# Altium PCB Schema.PcbDoc
Units mm, origin at the board's own origin, x right, y up, seen from the top; angles counter-clockwise.
Board outline 51.01 x 51.01 mm, 2 copper layers (Top Layer, Bottom Layer); 14 components, 9 nets, 44 pads, 15 vias.
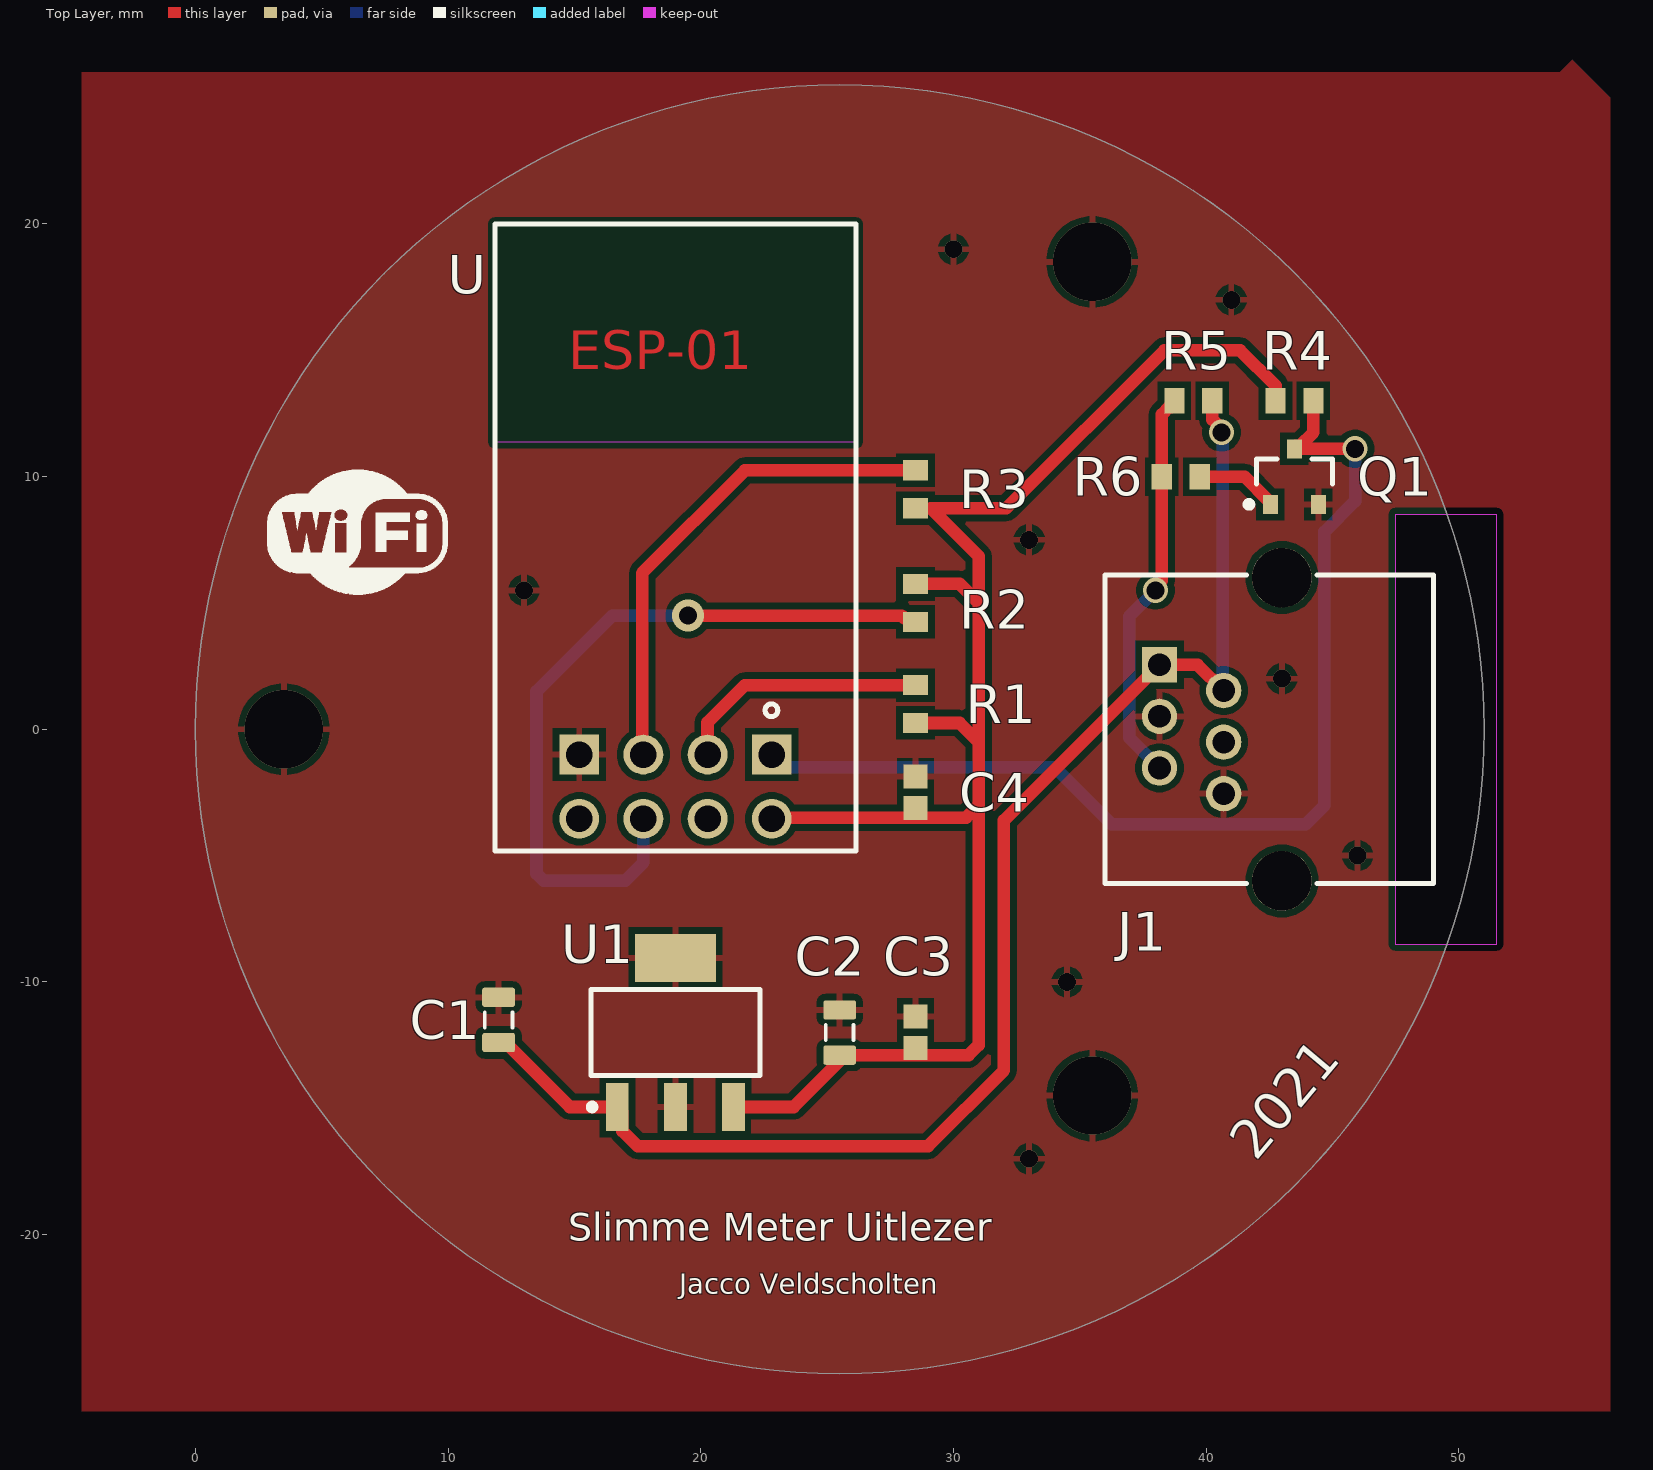
[diagram p0: Top Layer view]
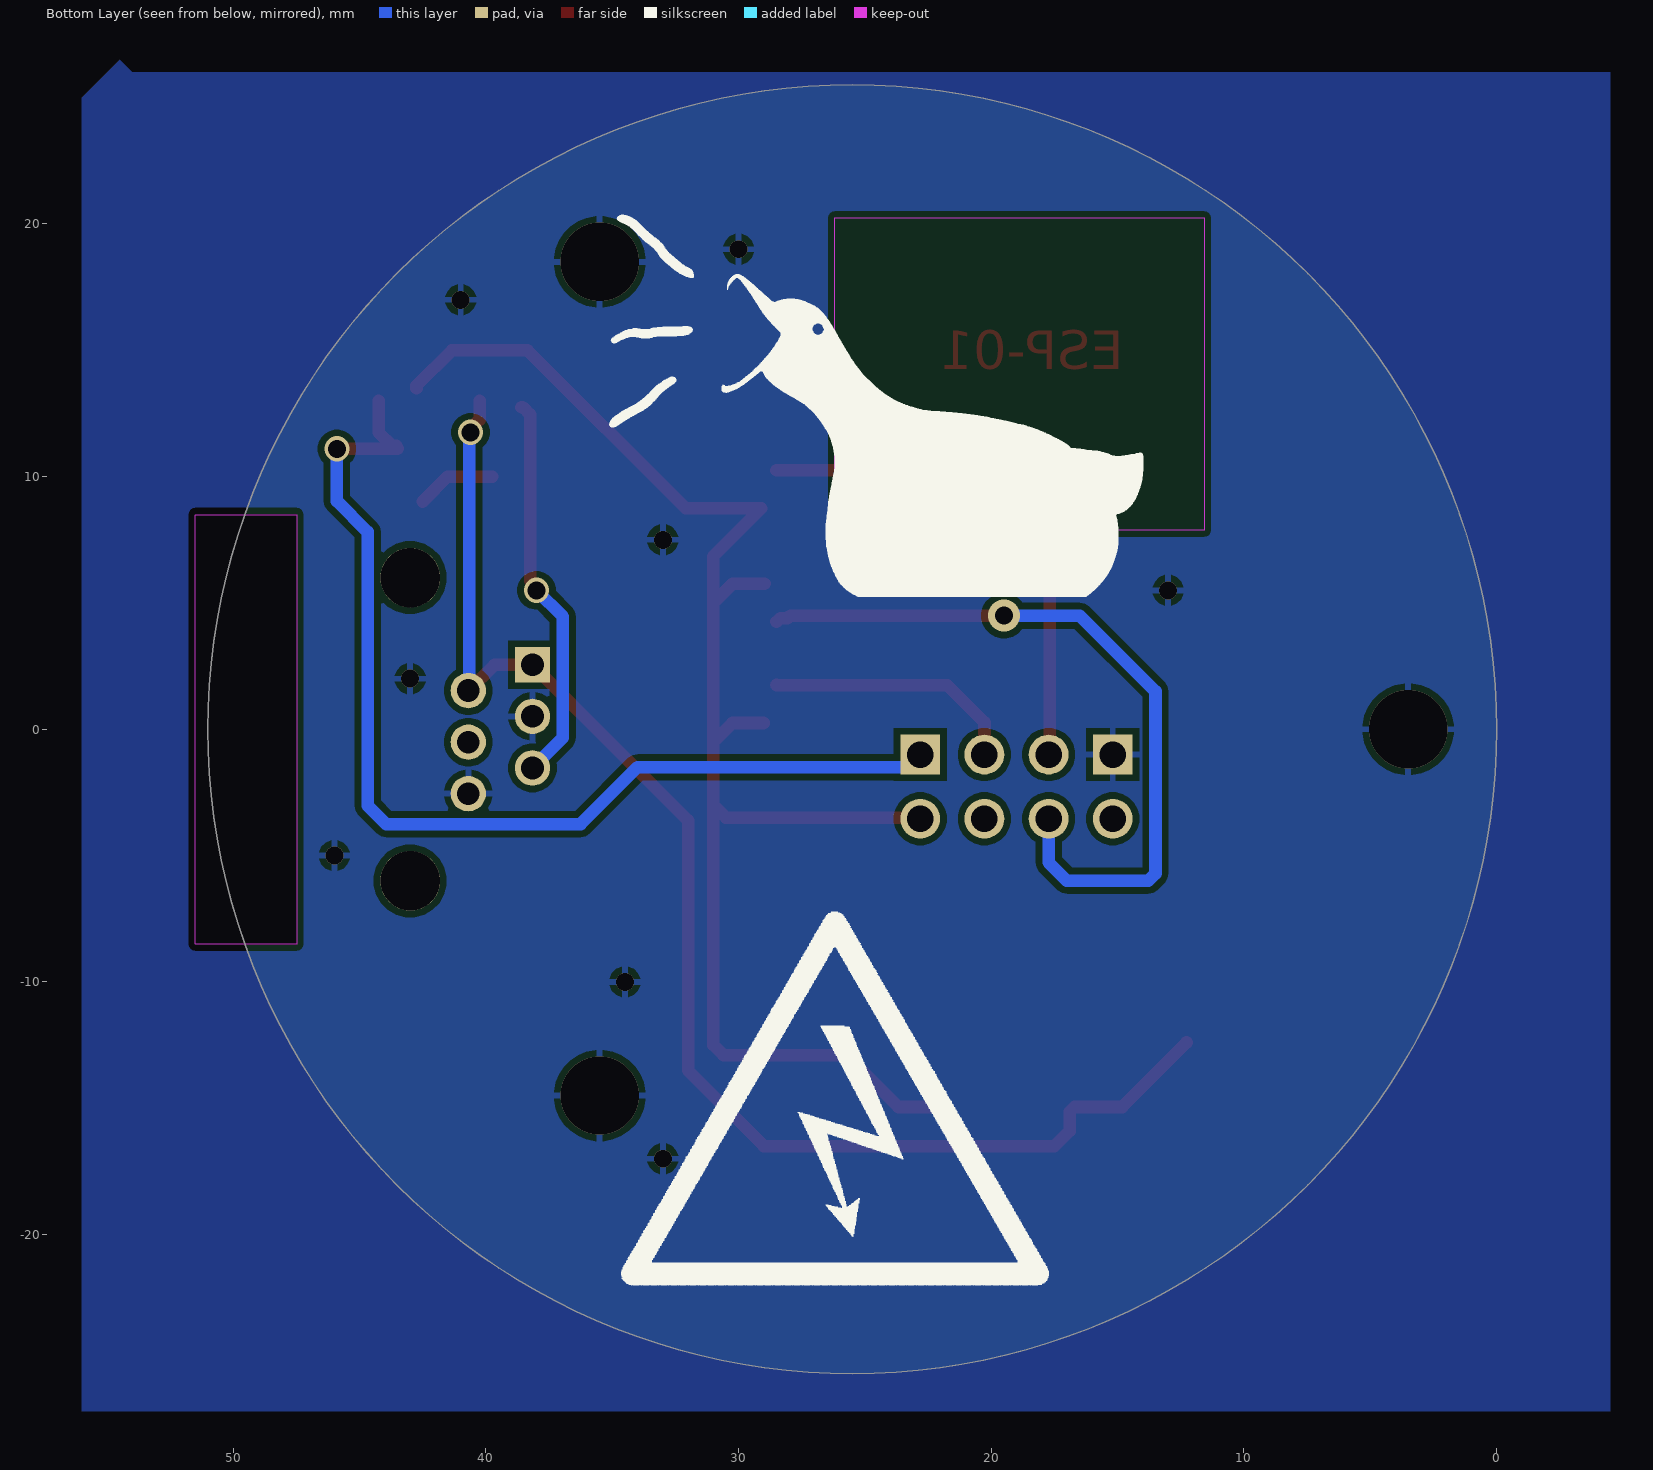
[diagram p1: Bottom Layer view, seen from below]
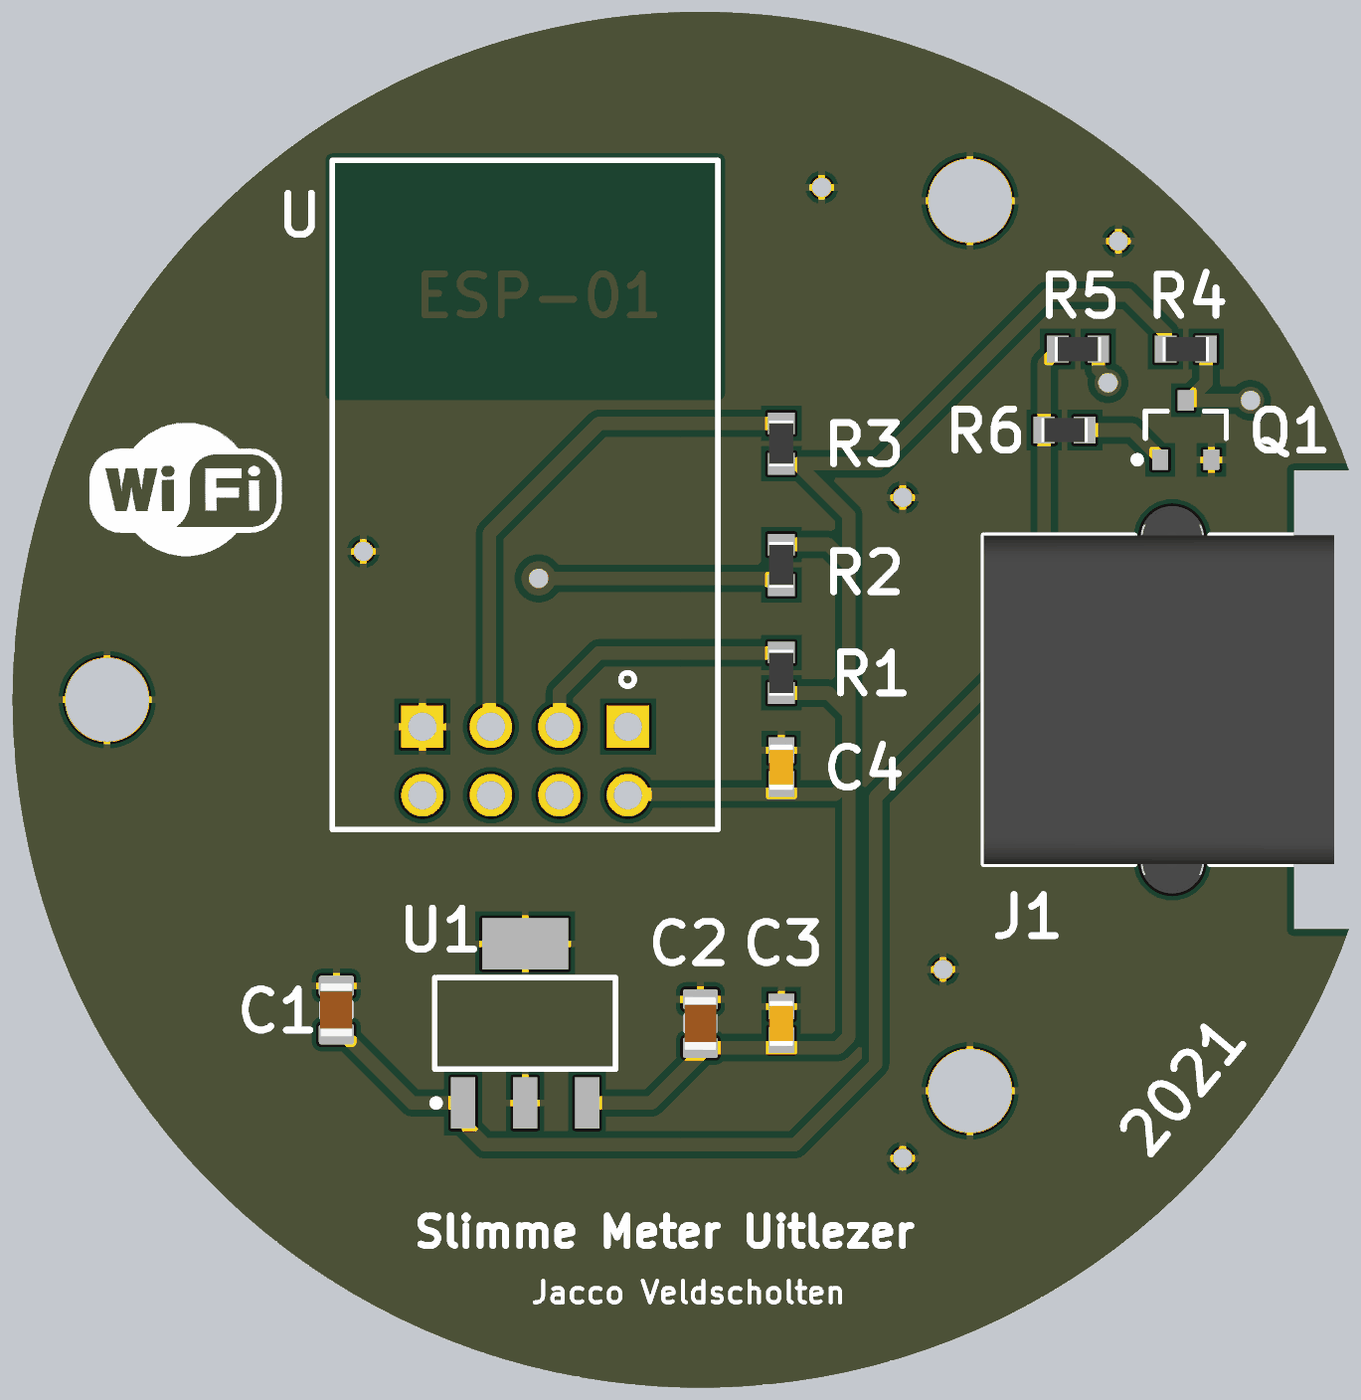
[diagram p2: 3D render of the assembled board from above, using the file's embedded part models]

## Layer stack, top to bottom
Top Solder: solder mask 0.0102, Solder Resist, Dk 3.5
Top Layer: signal copper 0.0356
Dielectric 1: dielectric 0.32, FR-4, Dk 4.8
Bottom Layer: signal copper 0.0356
Bottom Solder: solder mask 0.0102, Solder Resist, Dk 3.5

## Board outline
-0.005,0 ccw(c25.5,0) 25.5,-25.505 ccw(c25.5,0) 51.005,0 ccw(c25.5,0) 25.5,25.505 ccw(c25.5,0)
cut-out: 47.5,8.5 47.5,-8.5 51.5,-8.5 51.5,8.5

## Design rules (kind name [scope] priority, off if disabled: settings)
Clearance [All] p1: gap=0.254 ignorepadtopadclearanceinfootprint=FALSE except(0: Arc-Hole Track-Hole SMDPad-Hole THPad-Hole Via-Hole Fill-Hole Poly-Hole Region-Hole Text-Hole)
PolygonConnect [All] p1: connectstyle=Relief reliefconductorwidth=0.254 reliefentries=4 polygonreliefangle="90 Angle" airgapwidth=0.254
RoutingVias [All] p1: holewidth=0.711 width=1.27 viastyle="Through Hole" minholewidth=0.711 minwidth=1.27 maxholewidth=0.711 maxwidth=1.27
SolderMaskExpansion [All] p1: expansion=0.102 istentingtop=FALSE
Width [All] p1: maxlimit=0.5 minlimit=0.5 preferedwidth=0.5 minimp=50.000000 maximp=50.000000 favimp=50.000000
30 further rules are at their usual default settings.

## Components (designator, comment, footprint, x,y, rotation, side; value= is the part's Value field where it differs from the comment)
C1 "Capacitor 10µF +/-20% 25V 0805" CAPC0805(2012)145_L 12,-11.5 r90 top value=10µF
C2 "Capacitor 10µF +/-20% 25V 0805" CAPC0805(2012)145_L 25.5,-12 r90 top value=10µF
C3 "Capacitor 100 nF +/-10% 50 V 0603" CAPC1608X90X40NL10T20 28.5,-12 r90 top value=100nF
C4 "Capacitor 100 nF +/-10% 50 V 0603" CAPC1608X90X40NL10T20 28.5,-2.5 r90 top value=100nF
J1 "615006138421" 615006138421 42.5,0 r90 top
Q1 "BCW66KH" INF-SOT23_L 43.5,10 r90 top
R1 "Resistor 100k +/-1% 0603 100 mW" RESC1608X55X25ML10T15 28.5,1 r90 top value=10K
R2 "Resistor 100k +/-1% 0603 100 mW" RESC1608X55X25ML10T15 28.5,5 r90 top value=10K
R3 "Resistor 100k +/-1% 0603 100 mW" RESC1608X55X25ML10T15 28.5,9.5 r90 top value=10K
R4 "Resistor 100k +/-1% 0603 100 mW" RESC1608X55X25ML10T15 43.5,13 r180 top value=2.2K
R5 "Resistor 100k +/-1% 0603 100 mW" RESC1608X55X25ML10T15 39.5,13 r0 top value=2.2K
R6 "Resistor 100k +/-1% 0603 100 mW" RESC1608X55X25ML10T15 39,10 r0 top value=1k
U "ESP8266-01/ESP-01" XCVR_ESP8266-01/ESP-01 19,-1 r90 top
U1 "TC1262-3.3VDB" SOT-223-DB3_L 19,-12 r90 top

## Footprints (in the part's own frame and the unit in brackets; to place one, negate y for a bottom-side part, rotate by r counter-clockwise, add the part's x,y. Pads: shape width x height; smd on the part's side, far side on the other; paste and mask are expansions set on the pad)
615006138421 [mm] "Modular Jack Horizontal Plastic 6P6C Tab Up"
  rect 1.4x1.4 hole 0.9: 1(2.55,4.34)
  round 1.4 hole 0.9: 2(1.53,1.8) 3(0.51,4.34) 4(-0.51,1.8) 4(-0.51,1.8) 5(-1.53,4.34) 6(-2.55,1.8)
  round 2.36 hole 2.36 unplated: MH1(-6,-0.5) MH2(6,-0.5)
  silkscreen extent -6.1,-6.5 6.1,6.5, body extent -7.2,-6.5 7.2,6.5, height 14.55
CAPC0805(2012)145_L [mm] "Chip Capacitor, Body 2.0x1.2mm, Height 1.45mm, IPC High Density"
  rrect25% 0.76x1.3 smd: 1(-0.9,0) 2(0.89,0)
  silkscreen extent -0.3,-0.55 0.3,0.55, body extent -1,-0.6 1,0.6, height 1.45
CAPC1608X90X40NL10T20 [mm] "Chip Capacitor, 2-Leads, Body 1.70x0.90mm, IPC Medium Density"
  rect 0.95x0.95 smd: 1(-0.625,0) 2(0.625,0)
  body extent -0.85,-0.45 0.85,0.45, height 0.9
INF-SOT23_L [mm] "SOT23, 3-Leads, Body 2.9x1.3 mm, Pitch 0.95 mm, IPC High Density"
  rect 0.75x0.6 smd: 1(-1.1,0.95) 2(-1.1,-0.95) 3(1.1,0)
  silkscreen extent -1.22,-1.5 0.7,1.92, body extent -0.7,-1.5 0.7,1.5, height 1.1
RESC1608X55X25ML10T15 [mm] "Chip Resistor, 2-Leads, Body 1.70x0.90mm, IPC Low Density"
  rect 0.8x1 smd: 1(-0.75,0) 2(0.75,0)
  body extent -0.85,-0.45 0.85,0.45, height 0.55
SOT-223-DB3_L [mm] "SOT223, 4-Leads, Body 6.5x3.5mm, Pitch 2.3mm, Lead Span 7mm, IPC High Density"
  rect 1.9x0.9 smd: 1(-2.95,2.3) 2(-2.95,0) 3(-2.95,-2.3)
  rect 1.9x3.2 smd: 4(2.95,0)
  silkscreen extent -3.07,-3.35 1.7,3.42, body extent -1.85,-3.35 1.85,3.35, height 1.8
XCVR_ESP8266-01/ESP-01 [mm]
  rect 1.575x1.575 hole 1.05: 1(0,-3.81) 4(0,3.81)
  round 1.575 hole 1.05: 2(0,-1.27) 3(0,1.27) 5(-2.54,3.81) 6(-2.54,1.27) 7(-2.54,-1.27) 8(-2.54,-3.81)
  silkscreen extent -3.81,-7.15 21,7.15

## Part data
C1 C2: library part CMP-001-00079-3, "Chip Capacitor, 10µF +/-20%, 25V, 0805, Thickness 1.45 mm", Case/Package=0805, Max Operating Temperature=85°C, Min Operating Temperature=-55°C, Tolerance=10%, Voltage Rating=25V, Mounting Technology=SMT, Pins=2
C3 C4: library part CMP-001-00017-5, "Chip Capacitor, 100 nF, +/- 10%, 50 V, 0603 (1608 Metric)", Capacitor Type=Ceramic, Case/Package=0603, Max Operating Temperature=125°C, Min Operating Temperature=-55°C, Tolerance=10%, Voltage Rating=50V, Mounting Technology=SM, Pins=2, RoHS Compliant=True
J1: library part CMP-1502-01673-1, "Modular Jack WR-MJ, Tab Up, Plastic, Horizontal Entry, THT, 6P6C", Contact Resistance=20mOhm, Manufacturer="Wurth Elektronik", Operating Temperature=-40to85degC, Rated Current=1.5A, Withstanding Voltage=1000VAC, Working Voltage=120VAC, Compliance=Leadfree/RoHS, Datasheet URL=https://katalog.we-online.com/em/datasheet/615006138421.pdf, Entrance=Horizontal, Manufacturer URL=http://www.we-online.de, Mounting Technology=THT, Package Reference=615006138421, Packaging=Tray, Part Number=615006138421, Pin Number=6P6C, Port=1x1, Publisher=WurthElektronik
Q1: library part CMP-1177-00067-1, "NPN Silicon AF Transistor, 45 V VCEO, 800 mA IC, SOT23, Reel, Green", Manufacturer=Infineon, ComponentLink1Description="Manufacturer URL", ComponentLink1URL=http://www.infineon.com/, ComponentLink2Description=Datasheet, ComponentLink2URL=http://www.infineon.com/dgdl/bcw66k.pdf?folderId=db3a304314dca389011545f4eb561884&fileId=db3a304314dca389011547504ebe1a07, ComponentLink3Description="Package Specification", ComponentLink3URL=http://www.infineon.com/dgdl/SOT23-Package_Overview.pdf?folderId=db3a30431936bc4b0119532290053c66&fileId=db3a30431936bc4b0119533468123c85, fT (typ)="170Â MHz", Green=TRUE, IBM (max)="200Â mA", IC="100Â mA", IC (max)="800Â mA", ICBO (max)="20Â nA", ICM (max)="1,000Â mA", Mounting Technology="Surface Mount", PackageDescription="3-Pin Small Outline Transistor Package, 1.3 x 2.9 mm Body, 0.95 mm Pitch", PackageReference=SOT23, PackageVersion=Apr-08, Packing=Reel, PartNumber=BCW66KH, Polarity=NPN, Ptot (max)="500 mW", VCBO (max)="75Â V", VCE="1 V", VCEO (max)="45 V", VEBO (max)="5Â V"
R1 R2 R3 R4 R5 R6: library part CMP-009-00023-4, "Chip Resistor, 100 KOhm, +/- 1%, 0.1 W, -55 to 155 degC, 0603 (1608 Metric)", Case/Package=0603, Max Operating Temperature=155°C, Min Operating Temperature=-55°C, Power=100mW, Tolerance=1%, Voltage Rating=50V, Mounting Technology=SM, Pins=2, RoHS Compliant=True
U: "ESP-01 wifi module", Package=None, Availability=Unavailable, MF=AI-Thinker, MP=ESP8266-01/ESP-01, Price=None, SnapEDA_Link=https://www.snapeda.com/parts/ESP8266-01/ESP-01/AI-Thinker/view-part/106413/?ref=snap
U1: library part CMP-0136-00483-1, "500mA Fixed Output CMOS LDO, 3-Pin SOT-223, Extended Temperature", DatasheetVersion="revB, 2002", PackageDescription="3-Lead Plastic Small Outline Transistor (DB) [SOT-223]", PackageReference=SOT-223-DB3, PackageVersion="revBB, Aug-2009"

## Via types
v1: diameter 0.711, hole 0.711, Top Layer to Bottom Layer, 8 vias
v2: diameter 3.1, hole 3.1, Top Layer to Bottom Layer, 3 vias
v3: diameter 1, hole 0.711, Top Layer to Bottom Layer, 3 vias
v4: diameter 1.27, hole 0.711, Top Layer to Bottom Layer, 1 vias

## Nets (pads, with @x,y where several pads share a name; then routed paths per layer and width w, separated by ;. In a path a pad name is that pad's centre, name@x,y a point inside that pad or via, vN(x,y) a via of type N, cw(c..) or ccw(c..) an arc to the next point about the centre after c; other vN are vias at no path point)
3.3V: C2.1 C3.1 C4.1 R1.1 R2.2 R3.1 R4.2 U1.3 U.8 | length 62.2
  Top Layer w0.5: 21.8,-14.95 23.68,-14.95 25.73,-12.9 26,-12.9 28.5,-12.9 29.5,-12.9 30.6,-12.9 31,-12.5 31,-3 ; U.8 22.85,-3.5 30.5,-3.5 31,-3 ; R2.2@28.966,5.76 30.24,5.76 31,5 ; R1.1@29,0.25 30.25,0.25 31,-0.5 ; R4.2@42.75,13.5 42.75,13.6 41.35,15 38.35,15 32.1,8.75 29.1,8.75 31,6.85 31,5 ; 31,-3 31,-0.5 ; 31,-0.5 31,5
5V: C1.1 J1.1 J1.2 R5.2 U1.1 | length 56.3
  Top Layer w0.5: C1.1@12.27,-12.4 14.82,-14.95 U1.1 16.9,-15.15 16.9,-15.9 17.5,-16.5 29,-16.5 32,-13.5 32,-3.61 J1.1 39.669,2.55 40.689,1.53 J1.2 ; R5.2 40.25,12.254 40.614,11.89 v3(40.614,11.754)
  Bottom Layer w0.5: v3(40.614,11.754) 40.657,11.711 40.657,1.573 J1.2
GND: C1.2 C2.2 C3.2 C4.2 J1.3 J1.6 Q1.2 U1.2 U1.4 U.4
  other v1: 33,-17 34.5,-10 46,-5 43,2 13,5.5 33,7.5 41,17 30,19
  other v2: 35.5,-14.5 3.5,0 35.5,18.5
NetQ1_1: Q1.1 R6.2 | length 3.2
  Top Layer w0.5: R6.2 41.525,10 42.5,9.025 42.502,9.023 Q1.1@42.502,8.998
NetR1_2: R1.2 U.2 | length 10.6
  Top Layer w0.5: U.2@20.27,-1.5 20.27,0.27 21.739,1.739 28.489,1.739 R1.2
NetR2_1: R2.1 U.6 | length 29.4
  Top Layer w0.5: v4(19.5,4.5) 27.957,4.5 28.057,4.4 28.35,4.4 R2.1
  Bottom Layer w0.5: U.6@17.73,-4.04 17.73,-5.27 17,-6 13.793,-6 13.5,-5.707 13.5,1.5 16.5,4.5 v4(19.5,4.5)
NetR3_2: R3.2 U.3 | length 19.7
  Top Layer w0.5: U.3 17.679,-0.949 17.679,6.179 21.75,10.25 R3.2
RXD: Q1.3 R4.1 U.1 | length 42.3
  Top Layer w0.5: Q1.3 v3(45.9,11.1) ; Q1.3@43.55,11.225 43.725,11.225 44.25,11.75 R4.1
  Bottom Layer w0.5: U.1@22.81,-1.5 34,-1.5 36.254,-3.754 43.953,-3.754 44.684,-3.023 44.684,7.816 45.9,9.032 v3(45.9,11.1)
TXD: J1.5 R5.1 R6.1 | length 15.5
  Top Layer w0.5: v3(38,5.5) 38,5.635 38.25,5.885 38.25,12.457 38.543,12.75 R5.1@38.6,12.75
  Bottom Layer w0.5: v3(38,5.5) 36.956,4.456 36.956,-0.326 J1.5
pads on no net: J1.4 J1.MH1 J1.MH2 U.5 U.7

## Polygon pours and split planes (outlines as drawn)
GND on Bottom Layer "GND_L02_P000" (solid, pour order 0): -4.5,-27 56,-27 56,25 54.5,26.5 54,26 -4.5,26 -4.5,23
GND on Top Layer "GND_L01_P001" (solid, pour order 1): -4.5,-27 56,-27 56,25 54.5,26.5 54,26 -4.5,26 -4.5,23

## Keep-outs
Top Layer:
  rectangle: 11.85,11.372 26.158,20
  rectangle: 11.85,11.372 26.158,20
Bottom Layer:
  rectangle: 11.573,7.871 26.194,20.248

## Other copper
Top Layer:
  text "ESP-01" at 14.754,14.254 h1.52

## Silkscreen, mask and mechanical layers (free items; w line width, h text height)
Top Overlay:
  drawing of 4 lines, arcs and shapes, not listed
  text "2021" at 41.969,-17.142 h1.52 r50
  text "Slimme Meter Uitlezer" at 14.754,-20.246 h1.1
  text "Jacco Veldscholten" at 19.15,-22.35 h0.8
Bottom Overlay:
  drawing of 6 lines, arcs and shapes, not listed
Bottom Solder:
  region: 356 vertices and 0 holes, not listed, extent 28.248,13.472 30.628,17.9
Mechanical 1:
  circle w0.254: c25.5,0 r25.505
  lines w0.254: 20.5,-2.5 21.5,-2.5 22,-2.5